# EAGLE board InkTime_PCB (EAGLE 9.7.0)
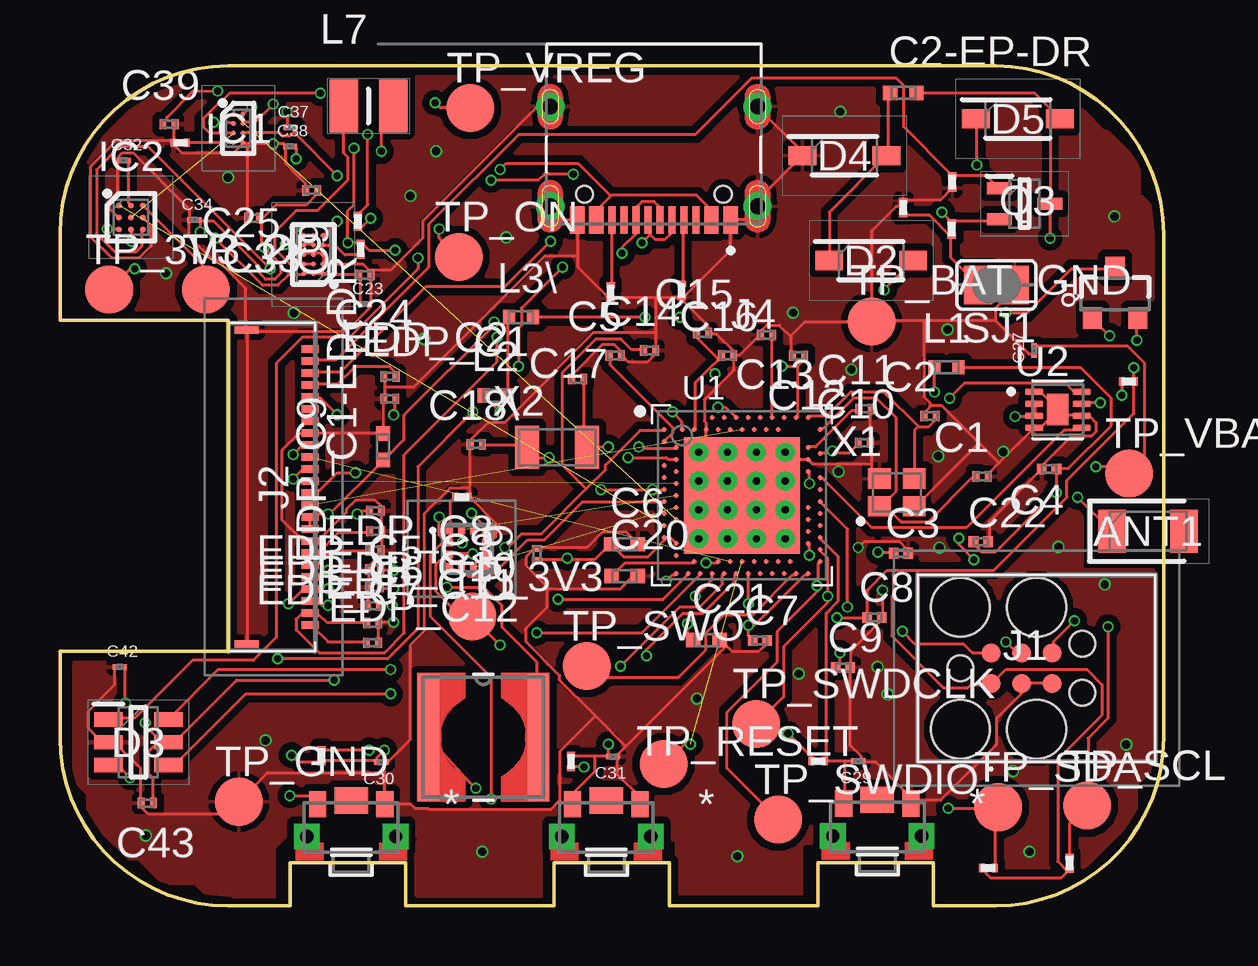
[diagram p0: board, top side]
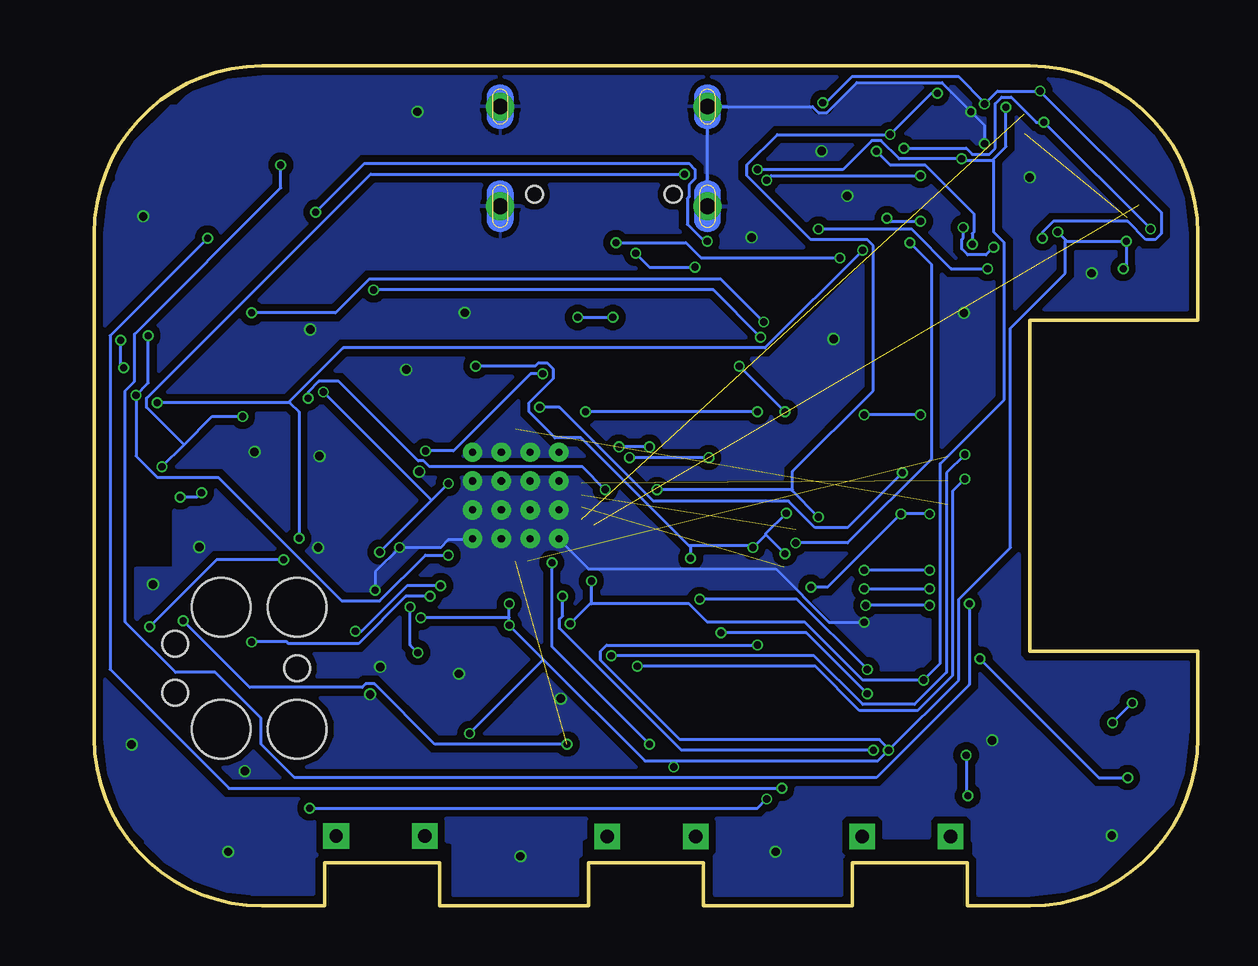
[diagram p1: board, bottom side, seen from below]

Size 46 x 35 mm. Coordinates in mm from the lower left corner, seen from the top.
Outline: 39,0 36.4,0 36.4,1.8 31.6,1.8 31.6,0 25.4,0 25.4,1.8 20.6,1.8 20.6,0 14.4,0 14.4,1.8 9.6,1.8 9.6,0 7,0 arc-90 0,7 0,10.6 7,10.6 7,24.4 0,24.4 0,28 arc-90 7,35 39,35 arc-90 46,28 46,7 arc-90 39,0
Copper layers (1*16): Top / Bottom
Stack-up Default Layer Stack: Top User Defined 0.035mm / Dielectric-1 User Defined 1.6mm / Bottom User Defined 0.035mm
Design rules: minimum copper width 5mil, minimum drill size 0.3mm, copper clearance wire_polygon to wire_polygon 5mil, copper clearance wire_polygon to pad_smd 5mil, copper clearance wire_polygon to via 5mil, copper clearance pad_smd to pad_smd 5mil, copper clearance pad_smd to via 5mil, copper clearance via to via 5mil, copper clearance smd to pad (same net) 5mil, copper clearance smd to via (same net) 5mil, copper clearance smd to smd (same net) 5mil, dimension clearance 0.2mm, via restrict clearance 0mil, restrict clearance 0mil, drill distance 6mil, keepout clearance 0mil

## Footprints (pad centres in the part's own frame; a part is rotated, then mirrored left to right if it is on the bottom)
2450AT18B100E_ANTC3216X140N = smd 1.15 x 1.8: 1 -1.5,0; 2 1.5,0
NORDIC_NRF_3_RESC0201_L = smd 0.28 x 0.43: 1 -0.255,0; 2 0.255,0
NORDIC_NRF_3_RESC0402_N = smd 0.6 x 0.6: 1 -0.55,0; 2 0.55,0
NORDIC_NRF_3_RESC0201_N = smd 0.4 x 0.45: 1 -0.305,0; 2 0.305,0
GRM011R60J152KE01L_2_CAPC0201X13N = smd 0.22 x 0.23: 1 -0.185,0; 2 0.185,0
ESP32_C6_LIBRARY_5_SOD3716X135N = smd 1.15 x 0.8: 1 -1.75,0; 2 1.75,0
ESP32_C6_LIBRARY_3_SOT95P280X145-6N = smd 1.2 x 0.6: 1 -1.25,0.95; 2 -1.25,0; 3 -1.25,-0.95; 4 1.25,-0.95; 5 1.25,0; 6 1.25,0.95
BQ25180YBGR_BGA8C40P2X4_100X155X50 = smd 0.2 x 0.2: A1 -0.2,0.6; A2 0.2,0.6; B1 -0.2,0.2; B2 0.2,0.2; C1 -0.2,-0.2; C2 0.2,-0.2; D1 -0.2,-0.6; D2 0.2,-0.6
DRV2605YZFR_BGA9C50P3X3_144X144X62 = smd 0.25 x 0.25: A1 -0.5,0.5; A2 0,0.5; A3 0.5,0.5; B1 -0.5,0; B2 0,0; B3 0.5,0; C1 -0.5,-0.5; C2 0,-0.5; C3 0.5,-0.5
BMA423_BMA423 = smd 0.3 x 0.35: 1 -0.75,-0.775; 2 -0.25,-0.775; 3 0.25,-0.775; 4 0.75,-0.775; 7 0.75,0.775; 8 0.25,0.775; 9 -0.25,0.775; 10 -0.75,0.775 | smd 0.35 x 0.3: 5 0.775,-0.25; 6 0.775,0.25; 11 -0.775,0.25; 12 -0.775,-0.25
RT6160AWSC_BGA15C40P3X5_140X230X60 = smd 0.216 x 0.216: A1 -0.4,0.8; A2 0,0.8; A3 0.4,0.8; B1 -0.4,0.4; B2 0,0.4; B3 0.4,0.4; C1 -0.4,0; C2 0,0; C3 0.4,0; D1 -0.4,-0.4; D2 0,-0.4; D3 0.4,-0.4; E1 -0.4,-0.8; E2 0,-0.8; E3 0.4,-0.8
TC2030-IDC_TC2030IDC = smd 0.783 x 0.783: 1 -0.953,-0.635; 2 -0.953,0.635; 3 0.317,-0.635; 4 0.317,0.635; 5 1.588,-0.635; 6 1.588,0.635 | hole 2.451: -2.223,-2.54; -2.223,2.54; 0.952,-2.54; 0.952,2.54 | hole 1.067: -2.223,0; 2.857,-1.016; 2.857,1.016
503480-2400_5034802400 = smd 0.3 x 0.7: 1 -5.75,1.525; 2 -5.25,1.525; 3 -4.75,1.525; 4 -4.25,1.525; 5 -3.75,1.525; 6 -3.25,1.525; 7 -2.75,1.525; 8 -2.25,1.525; 9 -1.75,1.525; 10 -1.25,1.525; 11 -0.75,1.525; 12 -0.25,1.525; 13 0.25,1.525; 14 0.75,1.525; 15 1.25,1.525; 16 1.75,1.525; 17 2.25,1.525; 18 2.75,1.525; 19 3.25,1.525; 20 3.75,1.525; 21 4.25,1.525; 22 4.75,1.525; 23 5.25,1.525; 24 5.75,1.525 | smd 0.3 x 1: MP1 -6.54,-1.125; MP2 6.54,-1.125
KH-TYPE-C-16P_KINGHELM_KH-TYPE-C-16P = smd 0.6 x 1.15: A1_B12 -3.2,4.725; A4_B9 -2.4,4.725; A9_B4 2.4,4.725; A12_B1 3.2,4.725 | smd 0.3 x 1.15: A5 -1.25,4.725; A6 -0.25,4.725; A7 0.25,4.725; A8 1.25,4.725; B5 1.75,4.725; B6 0.75,4.725; B7 -0.75,4.725; B8 -1.75,4.725 | drill 0.65 pad 1.05: SH1 -4.32,0; SH2 4.32,0; SH3 -4.32,4.15; SH4 4.32,4.15 | hole 0.7: -2.89,3.65; 2.89,3.65
NORDIC_NRF_2_RESC0402_L = smd 0.5 x 0.6: 1 -0.5,0; 2 0.5,0
ESP32_C6_LIBRARY_2_IND_4828-WE-TPC_WRE = smd 0.9 x 5.3: 1 -2.286,0; 2 2.286,0
MLP2016SR47MT0S1_INDC2016X100N = smd 1.2 x 2.2: 1 -1.028,0; 2 1.028,0
ESP32_C6_LIBRARY_4_ESP32_C6_LIBRARY_4_ESP32_C6_LIBRARY_4_ESP32_C6_LIBRARY_4_ESP32_WROVER_SPARKFUN-DISCRETESEMI_SOT23-3 = smd 0.8 x 0.9: 1 -0.95,-1; 2 0.95,-1; 3 0,1.1
ESP32_C6_LIBRARY_6_SOT65P210X110-3N = smd 1.05 x 0.5: 1 -1.05,0.65; 2 -1.05,-0.65; 3 1.05,0
CPF0201D7K68C1_0201 = smd 0.35 x 0.25: 1 0,0.275; 2 0,-0.275
ESP32_C6_LIBRARY_7_JUMPER_SJ = smd 1.168 x 1.6: 1 -0.762,0; 2 0.762,0
2025-10-22_07-23-44_LIBRARY_SW_EVP-AKE31A_PAN = smd 0.711 x 1.092: 1 -1.4,-0.972; 2 1.4,-0.972 | drill 0.559 pad 0.914 square: 3 -1.848,0.381; 4 1.848,0.381 | smd 1.397 x 1.092: 5 0,-1.124
HECTOR_WATCH_1_TP20R = smd 2 x 2: TP 0,0
NORDIC_NRF_4_AQFN50P700X700X85_HS-74N = smd 4.85 x 4.85: P$74 0,0 | drill 0.3 pad 0.6: P$75 -1.8,1.8; P$76 -0.6,1.8; P$77 0.6,1.8; P$78 1.8,1.8; P$79 -1.8,0.6; P$80 -0.6,0.6; P$81 0.6,0.6; P$82 1.8,0.6; P$83 -1.8,-0.6; P$84 -0.6,-0.6; P$85 0.6,-0.6; P$86 1.8,-0.6; P$87 -1.8,-1.8; P$88 -0.6,-1.8; P$89 0.6,-1.8; P$90 1.8,-1.8 | smd 0.2 x 0.2: P$A8 -1.25,3.25; P$A10 -0.75,3.25; P$A12 -0.25,3.25; P$A14 0.25,3.25; P$A16 0.75,3.25; P$A18 1.25,3.25; P$A20 1.75,3.25; P$A22 2.25,3.25; P$A23 2.75,3.25; P$AA24 3.25,-2.25; P$AB2 -2.75,-2.5; P$AC5 -2,-2.75; P$AC9 -1,-2.75; P$AC11 -0.5,-2.75; P$AC13 0,-2.75; P$AC15 0.5,-2.75; P$AC17 1,-2.75; P$AC19 1.5,-2.75; P$AC21 2,-2.75; P$AC24 3.25,-2.75; P$AD2 -2.75,-3.25; P$AD4 -2.25,-3.25; P$AD6 -1.75,-3.25; P$AD8 -1.25,-3.25; P$AD10 -0.75,-3.25; P$AD12 -0.25,-3.25; P$AD14 0.25,-3.25; P$AD16 0.75,-3.25; P$AD18 1.25,-3.25; P$AD20 1.75,-3.25; P$AD22 2.25,-3.25; P$AD23 2.75,-3.25; P$B1 -3.25,2.75; P$B3 -2.5,2.75; P$B5 -2,2.75; P$B7 -1.5,2.75; P$B9 -1,2.75; P$B11 -0.5,2.75; P$B13 0,2.75; P$B15 0.5,2.75; P$B17 1,2.75; P$B19 1.5,2.75; P$B24 3.25,2.75; P$C1 -3.25,2.25; P$D2 -2.75,2; P$D23 2.75,2; P$E24 3.25,1.75; P$F2 -2.75,1.5; P$F23 2.75,1.5; P$G1 -3.25,1.25; P$H2 -2.75,1; P$H23 2.75,1; P$J1 -3.25,0.75; P$J24 3.25,0.75; P$K2 -2.75,0.5; P$L1 -3.25,0.25; P$L24 3.25,0.25; P$M2 -2.75,0; P$N1 -3.25,-0.25; P$N24 3.25,-0.25; P$P2 -2.75,-0.5; P$P23 2.75,-0.5; P$R1 -3.25,-0.75; P$R24 3.25,-0.75; P$T2 -2.75,-1; P$T23 2.75,-1; P$U1 -3.25,-1.25; P$U24 3.25,-1.25; P$V23 2.75,-1.5; P$W1 -3.25,-1.75; P$W24 3.25,-1.75; P$Y2 -2.75,-2; P$Y23 2.75,-2
ESP32_C6_LIBRARY_SON50P200X200X80-9N = smd 0.76 x 0.27: 1 -0.985,0.75; 2 -0.985,0.25; 3 -0.985,-0.25; 4 -0.985,-0.75; 5 0.985,-0.75; 6 0.985,-0.25; 7 0.985,0.25; 8 0.985,0.75 | smd 0.9 x 1.3: 9 0,0
NORDIC_NRF_BT-XTAL_2016_N = smd 0.95 x 0.85: 1 -0.725,-0.575; 2 0.725,-0.575; 3 0.725,0.575; 4 -0.725,0.575
NORDIC_NRF_1_XTAL_3215_N = smd 1 x 1.8: 1 -1.25,0; 2 1.25,0

## Placement (x,y rotation side)
ANT1  2450AT18B100E  [2450AT18B100E_ANTC3216X140N]  45.35,15.62 0 top
C1  12pF  [NORDIC_NRF_3_RESC0201_L]  38.43,17.89 0 top
C1-ED-DR  10uF  [NORDIC_NRF_3_RESC0402_N]  13.47,19.13 90 top
C2  12pF  [NORDIC_NRF_3_RESC0201_L]  36.27,20.41 0 top
C2-EP-DR  4.7uF  [NORDIC_NRF_3_RESC0402_N]  35.15,33.87 0 top
C3  1pF  [NORDIC_NRF_3_RESC0201_N]  35.05,14.69 0 top
C4  1pF  [NORDIC_NRF_3_RESC0201_N]  41.23,18.2 180 top
C5  100nF  [NORDIC_NRF_3_RESC0201_L]  23.14,22.93 0 top
C6  4.7uF  [NORDIC_NRF_3_RESC0402_N]  23.53,15.07 0 top
C7  100nF  [NORDIC_NRF_3_RESC0201_N]  29.17,11.06 0 top
C8  100nF  [NORDIC_NRF_3_RESC0201_N]  33.95,12.02 0 top
C9  820pF  [NORDIC_NRF_3_RESC0201_N]  32.64,9.93 0 top
C10  N.C.  [NORDIC_NRF_3_RESC0201_L]  33.53,19.29 0 top
C11  100pF  [NORDIC_NRF_3_RESC0201_L]  33.56,20.71 0 top
C12  100nF  [NORDIC_NRF_3_RESC0201_L]  30.78,22.92 180 top
C13  N.C.  [NORDIC_NRF_3_RESC0201_L]  29.45,23.79 180 top
C14  4.7uF  [NORDIC_NRF_3_RESC0201_L]  24.58,23.14 0 top
C15  1.0uF  [NORDIC_NRF_3_RESC0201_L]  26.78,23.86 0 top
C16  47nF  [NORDIC_NRF_3_RESC0201_L]  27.83,22.93 0 top
C17  12pF  [NORDIC_NRF_3_RESC0201_L]  21.58,21.95 0 top
C18\  12pF  [NORDIC_NRF_3_RESC0201_L]  17.35,19.23 0 top
C19  100nF  [NORDIC_NRF_3_RESC0201_L]  19.88,14.63 90 top
C20  4.7uF  [NORDIC_NRF_3_RESC0402_N]  23.54,13.74 0 top
C21  4.7uF  [NORDIC_NRF_3_RESC0402_N]  26.94,11.07 0 top
C22  N.C.  [NORDIC_NRF_3_RESC0201_N]  38.38,15.18 0 top
C23  0.1uF  [GRM011R60J152KE01L_2_CAPC0201X13N]  12.71,25.07 0 top
C24  10uF  [NORDIC_NRF_3_RESC0201_L]  12.71,26.29 180 top
C25  22uF  [NORDIC_NRF_3_RESC0201_L]  10.49,29.81 180 top
C27  0.1uF  [GRM011R60J152KE01L_2_CAPC0201X13N]  40.61,23.14 90 top
C29  1uF  [GRM011R60J152KE01L_2_CAPC0201X13N]  33.27,6.03 180 top
C30  1uF  [GRM011R60J152KE01L_2_CAPC0201X13N]  13.4,5.99 180 top
C31  1uF  [GRM011R60J152KE01L_2_CAPC0201X13N]  23.05,6.23 180 top
C32  1uF  [GRM011R60J152KE01L_2_CAPC0201X13N]  2.66,31.06 0 top
C33  22uF  [NORDIC_NRF_3_RESC0201_L]  8.07,28.66 180 top
C34  0.1uF  [GRM011R60J152KE01L_2_CAPC0201X13N]  5.61,28.58 0 top
C37  1uF  [GRM011R60J152KE01L_2_CAPC0201X13N]  9.61,32.43 0 top
C38  1uF  [GRM011R60J152KE01L_2_CAPC0201X13N]  9.59,31.64 0 top
C39  10uF  [NORDIC_NRF_3_RESC0201_L]  4.54,32.57 0 top
C42  0.1uF  [GRM011R60J152KE01L_2_CAPC0201X13N]  2.49,9.96 0 top
C43  4.7uF  [NORDIC_NRF_3_RESC0201_L]  3.64,4.28 180 top
D2  MBR0530  [ESP32_C6_LIBRARY_5_SOD3716X135N]  33.81,26.89 0 top
D3  USBLC6-2SC6Y  [ESP32_C6_LIBRARY_3_SOT95P280X145-6N]  3.27,6.82 0 top
D4  MBR0530  [ESP32_C6_LIBRARY_5_SOD3716X135N]  32.7,31.26 0 top
D5  MBR0530  [ESP32_C6_LIBRARY_5_SOD3716X135N]  39.93,32.79 0 top
EDP_C1  10uF  [NORDIC_NRF_3_RESC0201_L]  13.75,21.13 0 top
EDP_C2  10uF  [NORDIC_NRF_3_RESC0201_L]  13.75,22.06 0 top
EDP_C5  0.1uF/50V  [NORDIC_NRF_3_RESC0201_L]  13.15,16.46 180 top
EDP_C6  1uF/50V  [NORDIC_NRF_3_RESC0201_L]  13.16,15.61 180 top
EDP_C7  1uF/50V  [NORDIC_NRF_3_RESC0201_L]  13.13,14.81 180 top
EDP_C8  1uF/50V  [NORDIC_NRF_3_RESC0201_L]  13.11,14.02 0 top
EDP_C9  1uF/50V  [NORDIC_NRF_3_RESC0201_L]  13.1,13.28 0 top
EDP_C10  1uF/50V  [NORDIC_NRF_3_RESC0201_L]  13.06,12.5 0 top
EDP_C11  1uF/50V  [NORDIC_NRF_3_RESC0201_L]  13.04,11.78 0 top
EDP_C12  1uF/50V  [NORDIC_NRF_3_RESC0201_L]  13.03,10.96 0 top
IC1  BQ25180YBGR  [BQ25180YBGR_BGA8C40P2X4_100X155X50]  7.43,32.4 0 top
IC2  DRV2605YZFR  [DRV2605YZFR_BGA9C50P3X3_144X144X62]  2.96,28.69 0 top
IC3  BMA421  [BMA423_BMA423]  16.99,14.89 270 top
IC9  RT6160AWSC  [RT6160AWSC_BGA15C40P3X5_140X230X60]  10.56,27.14 180 top
J1  TC2030-IDC_TC2030-IDC  [TC2030-IDC_TC2030IDC]  39.76,9.9 0 top
J2  503480-2400_503480-2400  [503480-2400_5034802400]  8.9,17.45 270 top
J4  KH-TYPE-C-16P  [KH-TYPE-C-16P_KINGHELM_KH-TYPE-C-16P]  24.76,33.3 180 top
L1  3.9nH  [NORDIC_NRF_2_RESC0402_L]  36.95,22.44 0 top
L2  10uH  [NORDIC_NRF_2_RESC0402_L]  18.15,21.26 0 top
L3\  15nH  [NORDIC_NRF_2_RESC0402_L]  19.22,24.53 0 top
L5  68 uH  [ESP32_C6_LIBRARY_2_IND_4828-WE-TPC_WRE]  17.65,7.02 0 top
L7  FTC252012SR47MBCA  [MLP2016SR47MT0S1_INDC2016X100N]  12.86,33.33 0 top
Q1  20V/4.2A/52mΩ/1.4W  [ESP32_C6_LIBRARY_4_ESP32_C6_LIBRARY_4_ESP32_C6_LIBRARY_4_ESP32_C6_LIBRARY_4_ESP32_WROVER_SPARKFUN-DISCRETESEMI_SOT23-3]  43.98,25.49 0 top
Q3  SI1308EDL-T1-GE3  [ESP32_C6_LIBRARY_6_SOT65P210X110-3N]  40.21,29.26 0 top
R1  10K  [CPF0201D7K68C1_0201]  12.53,27.36 0 top
R1_EP_DR1  0.47  [CPF0201D7K68C1_0201]  37.17,28.2 0 top
R1_USB  5K1  [CPF0201D7K68C1_0201]  25.91,25.64 180 top
R2  10K  [CPF0201D7K68C1_0201]  12.42,28.52 0 top
R2_EP_DR  10K  [CPF0201D7K68C1_0201]  37.18,30.16 0 top
R2_USB  5K1  [CPF0201D7K68C1_0201]  22.95,25.58 0 top
R3  0  [CPF0201D7K68C1_0201]  16.75,17.04 270 top
R5  10K  [CPF0201D7K68C1_0201]  10.9,6.26 0 top
R7  10K  [CPF0201D7K68C1_0201]  31.61,6.03 90 top
R8  10K  [CPF0201D7K68C1_0201]  21.3,6.02 180 top
R9  10K  [CPF0201D7K68C1_0201]  5.01,31.8 90 top
R17  3K3  [CPF0201D7K68C1_0201]  42.08,1.78 0 top
R18  3K3  [CPF0201D7K68C1_0201]  38.69,1.57 270 top
R_PWR_EPD  10K  [CPF0201D7K68C1_0201]  44.54,21.85 270 top
R_TYPE_SEL  2.2  [CPF0201D7K68C1_0201]  35.14,29.1 180 top
SJ1  [ESP32_C6_LIBRARY_7_JUMPER_SJ]  39.03,25.87 180 top
SW_DN  2025-10-22_07-23-44_LIBRARY_EVP-AKE31ASW_EVP-AKE31A_PAN  [2025-10-22_07-23-44_LIBRARY_SW_EVP-AKE31A_PAN]  34.07,3.29 180 top
SW_ENT  2025-10-22_07-23-44_LIBRARY_EVP-AKE31ASW_EVP-AKE31A_PAN  [2025-10-22_07-23-44_LIBRARY_SW_EVP-AKE31A_PAN]  22.77,3.27 180 top
SW_UP  2025-10-22_07-23-44_LIBRARY_EVP-AKE31ASW_EVP-AKE31A_PAN  [2025-10-22_07-23-44_LIBRARY_SW_EVP-AKE31A_PAN]  12.14,3.27 180 top
TP_3V3  HECTOR_WATCH_1_TPTP20R  [HECTOR_WATCH_1_TP20R]  17.19,12.05 0 top
TP_3V3_2  HECTOR_WATCH_1_TPTP20R  [HECTOR_WATCH_1_TP20R]  2.05,25.68 0 top
TP_BAT_GND  HECTOR_WATCH_1_TPTP20R  [HECTOR_WATCH_1_TP20R]  33.83,24.34 0 top
TP_GND  HECTOR_WATCH_1_TPTP20R  [HECTOR_WATCH_1_TP20R]  7.46,4.34 0 top
TP_ON  HECTOR_WATCH_1_TPTP20R  [HECTOR_WATCH_1_TP20R]  16.62,27.04 0 top
TP_OP  HECTOR_WATCH_1_TPTP20R  [HECTOR_WATCH_1_TP20R]  6.09,25.68 0 top
TP_RESET  HECTOR_WATCH_1_TPTP20R  [HECTOR_WATCH_1_TP20R]  25.16,5.91 0 top
TP_SCL  HECTOR_WATCH_1_TPTP20R  [HECTOR_WATCH_1_TP20R]  42.82,4.17 0 top
TP_SDA  HECTOR_WATCH_1_TPTP20R  [HECTOR_WATCH_1_TP20R]  39.1,4.11 0 top
TP_SWDCLK  HECTOR_WATCH_1_TPTP20R  [HECTOR_WATCH_1_TP20R]  29.03,7.58 0 top
TP_SWDIO  HECTOR_WATCH_1_TPTP20R  [HECTOR_WATCH_1_TP20R]  29.93,3.59 0 top
TP_SWO  HECTOR_WATCH_1_TPTP20R  [HECTOR_WATCH_1_TP20R]  21.95,9.99 0 top
TP_VBAT  HECTOR_WATCH_1_TPTP20R  [HECTOR_WATCH_1_TP20R]  44.56,18.02 0 top
TP_VREG  HECTOR_WATCH_1_TPTP20R  [HECTOR_WATCH_1_TP20R]  17.11,33.25 0 top
U1  NRF52840_QF  [NORDIC_NRF_4_AQFN50P700X700X85_HS-74N]  28.43,17.1 0 top
U2  ESP32_C6_LIBRARY_MAX17048G+T10  [ESP32_C6_LIBRARY_SON50P200X200X80-9N]  41.59,20.68 0 top
X1  32MHz  [NORDIC_NRF_BT-XTAL_2016_N]  34.88,17.23 0 top
X2  32.726kHz  [NORDIC_NRF_1_XTAL_3215_N]  20.73,19.11 0 top

## Library data of the parts
ANT1 = InkTime_v5; ARROW_PART_NUMBER: 2450AT18B100E; ARROW_PRICE-STOCK: https://www.arrow.com/en/products/2450at18b100e/johanson-dielectrics?utm_currency=USD&region=nac; DESCRIPTION: Antennas 2.45GHz ANTENNA; HEIGHT: 1.4mm; MANUFACTURER_NAME: JOHANSON TECHNOLOGY; MANUFACTURER_PART_NUMBER: 2450AT18B100E; MOUSER_PART_NUMBER: 609-2450AT18B100E; MOUSER_PRICE-STOCK: https://www.mouser.co.uk/ProductDetail/Johanson-Technology/2450AT18B100E?qs=yCnrNFeXz%252Bh5MFsFIXGZGA%3D%3D
C1 C1-ED-DR C2 C2-EP-DR C3-C17 C18\ C19-C22 C24 C25 C33 C39 C43 EDP_C1 EDP_C2 EDP_C5-EDP_C12 L1 L2 L3\ R1 R1_EP_DR1 R1_USB R2 R2_EP_DR R2_USB R3 R5 R7-R9 R17 R18 R_PWR_EPD R_TYPE_SEL SJ1 TP_3V3 TP_3V3_2 TP_BAT_GND TP_GND TP_ON TP_OP TP_RESET TP_SCL TP_SDA TP_SWDCLK TP_SWDIO TP_SWO TP_VBAT TP_VREG U1 X1 X2 = InkTime_v5
C23 C27 C29-C32 C34 C37 C38 C42 = InkTime_v5; AVAILABILITY: In Stock; CHECK_PRICES: https://www.snapeda.com/parts/GRM011R60J152KE01L/Murata/view-part/?ref=eda; DESCRIPTION: SMD Capacitor X5R(EIA) with Capacitance: 1500pF Tol. 10%. Rated Voltage: 6.3Vdc; MF: Murata; MP: GRM011R60J152KE01L; PACKAGE: 0201 Murata; PRICE: None; SNAPEDA_LINK: https://www.snapeda.com/parts/GRM011R60J152KE01L/Murata/view-part/?ref=snap
D2 D4 D5 = InkTime_v5; AVAILABILITY: In Stock; CHECK_PRICES: https://www.snapeda.com/parts/MBR0530/Onsemi/view-part/?ref=eda; DESCRIPTION: Diode Schottky 30 V 500mA Surface Mount SOD-123; MF: ON Semiconductor; MP: MBR0530; PACKAGE: SOD-123-2 ON Semiconductor; PRICE: None; PURCHASE-URL: https://www.snapeda.com/api/url_track_click_mouser/?unipart_id=179458&manufacturer=ON Semiconductor&part_name=MBR0530&search_term=None; SNAPEDA_LINK: https://www.snapeda.com/parts/MBR0530/Onsemi/view-part/?ref=snap
D3 = InkTime_v5; AVAILABILITY: In Stock; CHECK_PRICES: https://www.snapeda.com/parts/USBLC6-2SC6Y/STMicroelectronics/view-part/?ref=eda; DESCRIPTION: 17V Clamp 5A (8/20µs) Ipp Tvs Diode Surface Mount SOT-23-6; MF: STMicroelectronics; MP: USBLC6-2SC6Y; PACKAGE: SOT-23-6 STMicroelectronics; PRICE: None; SNAPEDA_LINK: https://www.snapeda.com/parts/USBLC6-2SC6Y/STMicroelectronics/view-part/?ref=snap
IC1 = InkTime_v5; ARROW_PART_NUMBER: BQ25180YBGR; ARROW_PRICE-STOCK: https://www.arrow.com/en/products/bq25180ybgr/texas-instruments?utm_currency=USD&region=nac; DESCRIPTION: Charger IC Lithium Ion/Polymer, Lithium Iron Phosphate 8-DSBGA (1.6x1.1); HEIGHT: 0.5mm; MANUFACTURER_NAME: Texas Instruments; MANUFACTURER_PART_NUMBER: BQ25180YBGR; MOUSER_PART_NUMBER: 595-BQ25180YBGR; MOUSER_PRICE-STOCK: https://www.mouser.co.uk/ProductDetail/Texas-Instruments/BQ25180YBGR?qs=doiCPypUmgEWjAK%252BJAX6Tw%3D%3D
IC2 = InkTime_v5; ARROW_PART_NUMBER: DRV2605YZFR; ARROW_PRICE-STOCK: https://www.arrow.com/en/products/drv2605yzfr/texas-instruments?region=nac; DESCRIPTION: Haptic Driver for ERM/LRA with Built-In Library and Smart Loop Architecture; HEIGHT: 0.625mm; MANUFACTURER_NAME: Texas Instruments; MANUFACTURER_PART_NUMBER: DRV2605YZFR
IC3 = InkTime_v5; ARROW_PART_NUMBER: BMA423; ARROW_PRICE-STOCK: https://www.arrow.com/en/products/bma423/bosch; DESCRIPTION: Accelerometers Triaxial low-g 12bit Acceleration Sensor; HEIGHT: 1mm; MANUFACTURER_NAME: BOSCH; MANUFACTURER_PART_NUMBER: BMA423; MOUSER_PART_NUMBER: 262-BMA423; MOUSER_PRICE-STOCK: https://www.mouser.co.uk/ProductDetail/Bosch-Sensortec/BMA423?qs=HXFqYaX1Q2xC%252BSgeGoX3mg%3D%3D
IC9 = InkTime_v5; DESCRIPTION: Buck-Boost Regulator Positive Output Step-Up/Step-Down I2C DC-DC Controller IC 15-WL-CSP (BSC) (1.4x2.3); HEIGHT: 0.6mm; MANUFACTURER_NAME: RICHTEK; MANUFACTURER_PART_NUMBER: RT6160AWSC; MOUSER_PART_NUMBER: 835-RT6160AWSC; MOUSER_PRICE-STOCK: https://www.mouser.co.uk/ProductDetail/Richtek/RT6160AWSC?qs=amGC7iS6iy%2FLd9PSoixZXQ%3D%3D
J1 = InkTime_v5; DESCRIPTION: CABLE ADAPTER 6 POS; HEIGHT: 19mm; MANUFACTURER_NAME: Tag Connect; MANUFACTURER_PART_NUMBER: TC2030-IDC
J2 = InkTime_v5; DESCRIPTION: FFC & FPC Connectors 0.5mm FPC RA SMT Dual Contact 24Ckt; HEIGHT: 1.87mm; MANUFACTURER_NAME: Molex; MANUFACTURER_PART_NUMBER: 503480-2400; MOUSER_PART_NUMBER: 538-503480-2400; MOUSER_PRICE-STOCK: https://www.mouser.co.uk/ProductDetail/Molex/503480-2400?qs=OAhjpuo3Vu7efIoxFh9AOw%3D%3D
J4 = InkTime_v5; AVAILABILITY: Not in stock; CHECK_PRICES: https://www.snapeda.com/parts/KH-TYPE-C-16P/Kinghelm/view-part/?ref=eda; MF: kinghelm; MP: KH-TYPE-C-16P; PACKAGE: None; PRICE: None; SNAPEDA_LINK: https://www.snapeda.com/parts/KH-TYPE-C-16P/Kinghelm/view-part/?ref=snap
L5 = InkTime_v5; COPYRIGHT: Copyright (C) 2024 Ultra Librarian. All rights reserved.; MANUFACTURER_PART_NUMBER: 744043680; MFR_NAME: Wurth Electronics
L7 = InkTime_v5; DESCRIPTION: SMD / SMT Inductors (Coils), L=0.47?H, L x W x T :; HEIGHT: 1mm; JLCPCB: https://jlcpcb.com/partdetail/6763488-FTC252012SR47MBCA/C5832368; MANUFACTURER_NAME: TDK; MANUFACTURER_PART_NUMBER: FTC252012SR47MBCA
Q1 = InkTime_v5; PROD_ID: TRAN-14388
Q3 = InkTime_v5; AVAILABILITY: In Stock; CHECK_PRICES: https://www.snapeda.com/parts/SI1308EDL-T1-GE3/Vishay+Siliconix/view-part/?ref=eda; DESCRIPTION: Si1308EDL-T1-GE3 N-channel MOSFET Transistor, 1.5 A, 30 V, 3-Pin SC-70 | Siliconix / Vishay SI1308EDL-T1-GE3; MF: Vishay Siliconix; MP: SI1308EDL-T1-GE3; PACKAGE: SOT-323 Vishay Semiconductor; PRICE: None; PURCHASE-URL: https://www.snapeda.com/api/url_track_click_mouser/?unipart_id=274603&manufacturer=Vishay Siliconix&part_name=SI1308EDL-T1-GE3&search_term=None; SNAPEDA_LINK: https://www.snapeda.com/parts/SI1308EDL-T1-GE3/Vishay+Siliconix/view-part/?ref=snap
SW_DN SW_ENT SW_UP = InkTime_v5; COPYRIGHT: Copyright (C) 2025 Ultra Librarian. All rights reserved.; DIGI-KEY_PART_NUMBER_1: P123437TR-ND; DIGI-KEY_PART_NUMBER_2: P123437CT-ND; DIGI-KEY_PART_NUMBER_3: P123437DKR-ND; MANUFACTURER_NAME: Panasonic; MANUFACTURER_PART_NUMBER: EVP-AKE31A
U2 = InkTime_v5; AVAILABILITY: In Stock; CHECK_PRICES: https://www.snapeda.com/parts/MAX17048G+T10/Analog+Devices/view-part/?ref=eda; DESCRIPTION: 3µA 1-Cell/2-Cell Fuel Gauge with ModelGauge; MF: Analog Devices; MP: MAX17048G+T10; PACKAGE: TDFN-8 Maxim; PRICE: None; PURCHASE-URL: https://www.snapeda.com/api/url_track_click_mouser/?unipart_id=329239&manufacturer=Analog Devices&part_name=MAX17048G+T10&search_term=None; SNAPEDA_LINK: https://www.snapeda.com/parts/MAX17048G+T10/Analog+Devices/view-part/?ref=snap

## Nets
3V1: C5.1 U1.P$C1
3V3 [POWER]: C6.1 C7.1 C8.1 C12.1 C14.1 C19.1 C25.1 C33.1 C34.2 IC2.C2 IC3.3 IC3.7 IC3.10 IC9.E2 IC9.E3 J1.1 Q1.2 R5.1 R7.1 R8.1 R17.2 R18.2 R_PWR_EPD.1 TP_3V3.TP TP_3V3_2.TP U1.P$A22 U1.P$AD14 U1.P$AD23 U1.P$B1 U1.P$W1 U1.P$Y2
ALERT: U1.P$J24 U2.5
D+: D3.4 U1.P$AD6
D-: D3.6 U1.P$AD4
DN: D3.1 J4.A7 J4.B7
DP: D3.3 J4.A6 J4.B6
EPD_3V3 [POWER]: C1-ED-DR.1 EDP_C5.2 J2.15 J2.16 L5.2 Q1.3
EPD_BUSY: J2.9 U1.P$AD12
EPD_CS: J2.12 U1.P$K2
EPD_DC: J2.11 U1.P$AD10
EPD_RST: J2.10 U1.P$AC11
ESP_3V1: EDP_C6.2 J2.18
ESP_3V2: EDP_C7.2 J2.19
ESP_3V4: EDP_C8.2 J2.20
ESP_3V6: EDP_C10.2 J2.22
GDR: J2.2 Q3.1 R2_EP_DR.1
GND [POWER]: C1-ED-DR.2 C1.2 C2.1 C3.2 C4.2 C5.2 C6.2 C7.2 C8.2 C9.2 C10.2 C11.2 C12.2 C13.2 C14.2 C15.2 C16.2 C17.1 C18\.1 C19.2 C20.2 C21.2 C22.2 C23.2 C24.1 C25.2 C27.1 C29.1 C30.1 C31.1 C32.1 C33.2 C34.1 C37.1 C38.1 C39.2 C42.1 C43.2 D3.2 D4.1 EDP_C1.1 EDP_C2.1 EDP_C5.1 EDP_C6.1 EDP_C7.1 EDP_C8.1 EDP_C9.1 EDP_C10.1 EDP_C11.2 EDP_C12.2 IC1.D2 IC2.B1 IC2.B3 IC3.8 IC3.9 IC9.B1 IC9.C1 IC9.C2 IC9.C3 J1.3 J1.5 J2.8 J2.17 J2.MP1 J2.MP2 J4.A1_B12 J4.A12_B1 J4.SH1 J4.SH2 J4.SH3 J4.SH4 R1_USB.1 R2_EP_DR.2 R2_USB.2 R3.1 R9.1 R_TYPE_SEL.2 SJ1.1 SW_DN.1 SW_ENT.1 SW_UP.1 TP_BAT_GND.TP TP_GND.TP U1.P$74 U1.P$75 U1.P$76 U1.P$77 U1.P$78 U1.P$79 U1.P$80 U1.P$81 U1.P$82 U1.P$83 U1.P$84 U1.P$85 U1.P$86 U1.P$87 U1.P$88 U1.P$89 U1.P$90 U1.P$B7 U1.P$F23 U2.1 U2.4 U2.6 U2.9 X1.2 X1.4
GND1: C17.2 U1.P$D2 X2.2
GND2: C18\.2 U1.P$F2 X2.1
GND3: C2.2 U1.P$A23 X1.3
HAPTIC_EN: IC2.A1 U1.P$U1
IMU_INT1: IC3.5 U1.P$N1
IMU_INT2: IC3.6 U1.P$P2
LX1: IC9.B2 IC9.B3 L7.1
LX2: IC9.D2 IC9.D3 L7.2
MOSI: J2.14 U1.P$B13
N$1: L2.1 U1.P$B3
N$2: L2.2 L3\.1
N$3: C10.1 C15.1 C16.1 L3\.2 U1.P$B5 U1.P$E24
N$4: R1_EP_DR1.2 R_TYPE_SEL.1 SJ1.2
N$5: IC1.D1 R9.2
N$6: C2-EP-DR.2 D5.2 L5.1 Q3.3
N$7: C2-EP-DR.1 D2.1 D4.2
N$8: J4.A5 R1_USB.2
N$9: J4.B5 R2_USB.1
N$11: EDP_C2.2 J2.4
N$12: EDP_C1.2 J2.5
N$14: C32.2 IC2.A2
N$15: C13.1 U1.P$A18
N$19: C11.1 U1.P$D23
N$20: C1.1 U1.P$B24 X1.1
N$21: IC9.D1 R1.2
N$22: IC9.E1 R2.2
N$27: EDP_C12.1 J2.24
N$28: IC3.1 R3.2
N$39: C20.1 U1.P$AC5
N$69: C9.1 U1.P$N24
N$74: ANT1.1 C4.1 C22.1 L1.2
N$75: C3.1 L1.1 U1.P$H23
OUT+: IC2.A3 TP_OP.TP
OUT-: IC2.C3 TP_ON.TP
P0.04: U1.P$J1
P0.09: U1.P$L24
P0.13: C30.2 R5.2 SW_UP.2 U1.P$AD8
P0.14: C31.2 R8.2 SW_ENT.2 U1.P$AC9
P0.19: U1.P$AC15
P0.20: U1.P$AD16
P0.21: U1.P$AC17
P0.22: U1.P$AD18
P0.23: U1.P$AC19
P0.24: U1.P$AD20
P0.25: U1.P$AC21
P0.26: U1.P$G1
P0.27: U1.P$H2
P0.28: U1.P$B11
P0.29: U1.P$A10
P0.30: U1.P$B9
P0.31: U1.P$A8
P1.01: Q1.1 R_PWR_EPD.2 U1.P$Y23
P1.02: C29.2 R7.2 SW_DN.2 U1.P$W24
P1.03: U1.P$V23
P1.04: U1.P$U24
P1.05: U1.P$T23
P1.06: U1.P$R24
P1.07: U1.P$P23
P1.09: U1.P$R1
P1.10: U1.P$A20
P1.11: U1.P$B19
P1.12: U1.P$B17
P1.13: U1.P$A16
P1.14: U1.P$B15
P1.15: U1.P$A14
PMIC_INT: IC1.A1 U1.P$T2
PREVGH: D5.1 EDP_C9.2 J2.21
PREVGL: D2.2 EDP_C11.1 J2.23
RESE: J2.3 Q3.2 R1_EP_DR1.1
RESET: J1.6 TP_RESET.TP U1.P$AC13
SCK: J2.13 U1.P$A12
SCL: IC1.B1 IC2.C1 IC3.12 R1.1 R17.1 TP_SCL.TP U1.P$M2 U2.7
SDA: IC1.C1 IC2.B2 IC3.2 R2.1 R18.1 TP_SDA.TP U1.P$L1 U2.8
SWDCLK: J1.4 TP_SWDCLK.TP U1.P$AA24
SWDIO: J1.2 TP_SWDIO.TP U1.P$AC24
SWO: TP_SWO.TP U1.P$AD22
VBAT [POWER]: C27.2 C37.2 IC1.C2 TP_VBAT.TP U2.2 U2.3
VBUS [POWER]: C21.1 C38.2 C42.2 C43.1 D3.5 IC1.A2 J4.A4_B9 J4.A9_B4 U1.P$AD2
VREG [POWER]: C23.1 C24.2 C39.1 IC1.B2 IC9.A1 IC9.A2 IC9.A3 TP_VREG.TP

## Tracks (layer width: path | path; a pad name or v marks a point on that pad's centre or on a via)
3V1
  Top 0.127: U1.P$C1 25.21,19.38 25.52,19.69 25.52,19.95 22.92,22.55 22.92,22.93 C5.1
3V3  (via drill 0.3)
  Top 0.127: R18.2 38.48,1.53 38.61,1.41 38.61,1.34 38.8,1.15 41.72,1.15 42.03,1.47 R17.2 41.97,1.47 41.59,1.85 41.59,6.11 43.43,7.95 43.43,9.22 42.8,9.85 39.43,9.85 38.86,9.28 J1.1 38.8,9.22 37.97,9.22 37.84,9.09 36.83,9.09 34.67,11.25 34.67,12.9 34.73,12.96 34.73,13.98 | 34.73,13.98 34.48,13.98 33.65,13.15 33.65,12.07 C8.1 33.59,12.01 v32.38,12.01 | 34.73,13.98 38.92,13.98 41.97,17.03 41.97,17.73 44.77,20.52 44.77,21.79 R_PWR_EPD.1 44.77,21.85 v44.77,22.42 | v44.89,23.57 44.89,24.46 Q1.2 | 25.21,15.31 25.46,15.31 25.65,15.12 U1.P$Y2 | 25.21,15.31 U1.P$W1 | 21.14,14.42 22.29,14.42 22.92,15.06 C6.1 22.98,15.06 23.49,14.55 24.51,14.55 25.21,15.25 25.21,15.31 | 21.14,14.42 19.94,14.42 C19.1 | 30.73,22.49 30.73,20.39 U1.P$A22 | 30.73,22.49 30.98,22.74 30.98,22.87 C12.1 | 21.94,17.38 20.06,15.5 19.24,15.5 18.64,14.9 | 21.94,17.38 22.73,18.17 22.73,18.36 24.19,19.82 25.14,19.82 U1.P$B1 | 18.64,14.9 17.9,14.17 17.78,14.17 IC3.7 | v18.54,14.93 18.6,14.93 18.64,14.9 | C14.1 24.32,23.19 23.81,23.19 23.37,23.63 22.35,23.63 20.95,22.23 20.95,18.36 21.91,17.41 21.94,17.38 | v30.1,22.49 30.73,22.49 | v17.21,14.68 16.25,14.68 IC3.3 16.19,14.61 16.06,14.61 15.68,14.23 15.68,13.09 16.7,12.07 17.14,12.07 TP_3V3.TP 17.21,12.01 v18.35,10.87 | v21.14,14.49 21.14,14.42 | v2.98,27.69 2.98,28.14 IC2.C2 | v3.11,26.55 2.92,26.55 2.09,25.73 TP_3V3_2.TP | IC9.E2 10.54,27.95 10.22,27.95 IC9.E3 9.84,28.27 v9.78,28.27 | 5.84,28.52 6.41,28.52 8.32,26.62 8.32,26.36 8.57,26.11 8.95,26.11 9.21,26.36 9.21,26.74 v8.51,27.44 8.38,27.57 8.38,28.65 C33.1 8.44,28.65 9.01,29.22 10.29,29.22 10.73,29.66 10.73,29.79 C25.1
  Top 0.127: 5.84,28.52 C34.2 | v5.84,28.08 5.84,28.46 5.84,28.52 | v28.7,12.58 28.7,13.79 U1.P$AD14 | C7.1 28.83,11.12 28.7,11.25 v28.7,11.69 28.95,11.69 31.05,13.79 31.18,13.79 U1.P$AD23 | v12.89,6.49 10.92,6.49 R5.1 | v21.84,5.79 21.33,5.79 R8.1 | v30.35,7.18 31.3,6.23 31.3,6.04 R7.1 | IC3.10 17.71,15.69 17.71,15.8 v17.15,16.36
  Bottom 0.127: v44.89,23.57 44.89,22.55 v44.77,22.42 | 18,15.47 v18.54,14.93 18.54,15 21.14,15 | v30.1,22.49 27.62,22.49 27.49,22.61 27.11,22.61 26.86,22.36 26.86,21.98 27.87,20.96 27.87,20.58 26.8,19.5 25.71,19.5 21.21,15 21.14,15 | v17.21,14.68 17.97,15.44 18,15.47 | 21.14,15 v21.14,14.49 | v3.11,26.55 2.98,26.68 v2.98,27.69 5.46,27.69 5.49,27.73 | v9.78,28.27 9.78,27.82 9.84,27.76 9.84,27.38 9.59,27.12 8.82,27.12 v8.51,27.44 | v5.84,28.08 5.49,27.73 | 28.7,12.01 v28.7,11.69 27.27,10.26 | 28.7,12.01 v28.7,12.58 | v12.89,6.49 13.33,6.04 21.84,6.04 | 21.84,6.04 23.05,6.04 27.27,10.26 | 21.84,6.04 v21.84,5.79 | v30.35,7.18 27.3,10.23 27.27,10.26 | v12.89,6.49 9.97,9.41 9.97,12.77 7.81,14.93 7.81,24.08 5.52,26.36 5.52,27.69 5.49,27.73 | v18.35,10.87 24.64,10.87 24.89,10.61 24.89,10.23 21.59,6.93 13.27,6.93 12.89,6.55 v12.89,6.49 | 28.7,12.01 v32.38,12.01 | 18,15.47 18,15.52 v17.15,16.36
ALERT
  Top 0.127: U1.P$J24 31.68,17.79 31.81,17.79 33.84,15.76 37.78,15.76 41.84,19.82 42.48,19.82 42.54,19.88 U2.5
D+  (via drill 0.3)
  Top 0.127: v19.87,11.37 24.25,11.37 26.67,13.79 U1.P$AD6 | v13.78,8.84 7.74,8.84 4.82,5.92 4.57,5.92 D3.4
  Bottom 0.127: v19.87,11.37 16.32,11.37 v13.78,8.84
D-  (via drill 0.3)
  Top 0.127: v20.76,12.77 25.14,12.77 26.16,13.79 U1.P$AD4 | v13.78,9.85 6.6,9.85 4.57,7.82 D3.6
  Bottom 0.127: v20.76,12.77 16.7,12.77 v13.78,9.85
DN  (via drill 0.3)
  Top 0.127: 24.6,27.98 24.83,27.76 25.21,27.76 25.46,28.01 25.46,28.52 J4.B7 | 24.6,27.98 24.51,28.08 24.51,28.52 J4.A7 | v14.92,27 14.92,26.55 12.06,23.69 10.09,23.69 9.01,22.61 9.01,11.18 8.06,10.23 5.52,10.23 3.11,7.82 2.03,7.82 D3.1 | v24.25,27.63 24.57,27.95 24.6,27.98
  Bottom 0.127: v14.92,27 20.7,27 21.33,27.63 v24.25,27.63
DP  (via drill 0.3)
  Top 0.127: J4.A6 24.95,28.58 24.95,29.16 24.76,29.35 24.25,29.35 24.06,29.16 24.06,28.58 J4.B6 24,28.52 24,28.01 23.43,27.44 v23.43,27.19 | v2.92,5.34 2.41,5.85 2.03,5.85 D3.3 | v9.08,10.3 13.65,10.3 14.92,11.57 14.92,18.3 v17.21,20.58 | v19.11,22.49 19.11,24.08 19.24,24.2 19.24,24.9 v20.95,26.62
  Bottom 0.127: v2.92,5.34 4.12,5.34 v9.08,10.3 | v19.11,22.49 v17.21,20.58 | v20.95,26.62 22.86,26.62 v23.43,27.19
EPD_3V3  (via drill 0.3)
  Top 0.127: v12.38,16.33 12.51,16.46 EDP_C5.2 | J2.16 10.41,15.76 10.41,16.14 J2.15 10.47,16.26 10.54,16.33 v11.17,16.33 11.24,16.33 13.46,18.55 C1-ED-DR.1 13.52,18.61 14.35,19.44 14.35,20.46 18.09,24.2 v18.09,24.33 | v39.43,24.71 40.32,24.71 42.16,26.55 43.94,26.55 Q1.3 | v16.13,13.28 17.65,13.28 18.41,12.52 18.41,11.63 19.87,10.17 19.87,7.09 L5.2
  Bottom 0.127: v11.17,16.33 v12.38,16.33 15.43,13.28 v16.13,13.28 | v39.43,24.71 35.94,24.71 34.54,26.11 19.87,26.11 v18.09,24.33
EPD_BUSY  (via drill 0.3)
  Top 0.127: v24.45,10.42 24.45,10.68 25.97,12.2 26.8,12.2 28.13,13.53 28.13,13.79 U1.P$AD12 | v9.71,18.8 10.09,19.19 10.41,19.19 J2.9
  Bottom 0.127: v24.45,10.42 16,10.42 13.97,8.39 11.81,8.39 10.47,9.72 10.47,18.04 v9.71,18.8
EPD_CS  (1 unrouted)
EPD_DC  (via drill 0.3)
  Top 0.127: v23.37,9.98 25.84,12.46 26.67,12.46 27.62,13.41 27.62,13.79 U1.P$AD10 | v9.71,17.79 10.09,18.17 10.41,18.17 J2.11
  Bottom 0.127: v23.37,9.98 15.94,9.98 14.09,8.14 11.68,8.14 10.22,9.6 10.22,17.28 v9.71,17.79
EPD_RST  (1 unrouted)
ESP_3V1
  Top 0.127: EDP_C6.2 12.89,15.57 11.62,15.57 10.79,14.74 10.47,14.74 J2.18
ESP_3V2
  Top 0.127: EDP_C7.2 12.82,14.8 11.3,14.8 10.73,14.23 10.47,14.23 J2.19
ESP_3V4  (via drill 0.3)
  Top 0.127: v13.9,13.98 13.4,13.98 EDP_C8.2 | v11.17,13.98 10.98,13.98 10.73,13.72 10.47,13.72 J2.20
  Bottom 0.127: v11.17,13.98 v13.9,13.98
ESP_3V6  (via drill 0.3)
  Top 0.127: v13.84,12.52 13.33,12.52 EDP_C10.2 | v11.17,12.52 10.92,12.52 10.79,12.65 10.47,12.65 J2.22
  Bottom 0.127: v11.17,12.52 v13.84,12.52
GDR
  Top 0.127: Q3.1 39.11,29.92 38.61,30.43 37.21,30.43 R2_EP_DR.1 37.14,30.49 35.18,32.46 35.18,34.17 34.86,34.49 28.83,34.49 26.48,32.14 19.11,32.14 15.37,28.39 15.37,26.62 11.49,22.74 10.47,22.74 J2.2
GND  (via drill 0.3, 0.35)
  Top 0.127: J1.5 41.34,9.28 40.13,9.28 J1.3 40.07,9.22 40.07,8.84 39.05,7.82 39.05,6.74 36.7,4.39 35.46,4.39 SW_DN.1 35.43,4.31 35.43,4.57 34.02,5.98 33.46,5.98 C29.1 33.4,6.04 33.4,6.23 32.95,6.68 32.95,9.92 C9.2 32.95,9.98 32.95,10.61 34.22,11.88 34.22,12.01 C8.2 34.29,12.07 v34.29,13.15 | v33.27,14.93 33.53,15.19 34.99,15.19 35.3,14.87 35.3,14.74 C3.2 | C11.2 33.78,20.65 33.78,19.31 C10.2 33.84,19.25 33.84,18.42 | 33.84,18.42 33.84,18.11 34.1,17.85 X1.4 | U1.P$74 30.29,18.87 30.54,18.61 31.18,18.61 U1.P$F23 31.24,18.55 31.37,18.42 33.84,18.42 | 26.67,18.93 26.92,19.19 26.92,19.82 U1.P$B7 26.92,19.88 26.92,20.14 26.86,20.2 26.86,21.09 28.07,22.3 28.07,22.87 C16.2 | 26.67,18.93 U1.P$74 | 26.67,15.38 26.67,16.46 U1.P$83 | 26.67,15.38 U1.P$74 | U1.P$79 26.67,17.73 27.24,18.3 U1.P$74 | 26.67,18.93 U1.P$75 | 26.67,18.93 U1.P$74 | U1.P$84 27.81,16.52 U1.P$74 | U1.P$80 27.81,17.73 U1.P$74 | U1.P$74 28.45,17.09 29.02,16.52 U1.P$85 29.08,16.52 30.22,16.52 U1.P$86 | U1.P$81 29.02,17.73 U1.P$74 | U1.P$76 27.81,18.87 27.3,18.36 U1.P$74 | 29.65,18.3 29.08,18.87 U1.P$77 | 29.65,18.3 U1.P$74 | 29.65,18.3 30.22,17.73 U1.P$82 | 29.65,18.3 U1.P$74 | U1.P$78 30.29,18.93 U1.P$74 | U1.P$90 30.22,15.31 29.08,15.31 U1.P$74 | EDP_C12.2 13.27,10.99 13.27,11.76 EDP_C11.2 13.33,11.82 v13.9,11.82 | U1.P$89 29.02,15.31 27.87,15.31 U1.P$88 27.81,15.31 26.67,15.31 U1.P$87 26.67,15.38 | 26.67,15.38 U1.P$74 | C42.1 2.28,9.92 2.28,9.22 1.2,8.14 1.2,7.37 1.71,6.87 1.97,6.87 D3.2 2.03,6.8 2.28,6.8 3.36,5.72 3.36,4.33 C43.2 3.43,4.26 3.43,4.07 3.68,3.82 6.92,3.82 7.43,4.33 TP_GND.TP 7.49,4.39 8.65,5.55 13.38,5.55 13.5,5.44 13.5,5.29 13.52,5.26
  Top 0.127: 13.52,5.26 13.52,4.21 SW_UP.1 14.62,4.24 14.8,4.06 15.35,4.06 15.4,4.01 20.44,4.01 20.82,4.39 20.82,6.42 22.29,7.88 22.32,7.92 | 13.52,5.26 13.52,5.98 C30.1 13.59,6.04 13.71,6.04 14.6,6.93 14.6,10.87 15.17,11.44 15.17,16.33 16.25,17.41 17.08,17.41 | C6.2 24.06,15.12 23.62,15.57 22.6,15.57 21.97,14.93 19.94,14.93 C19.2 19.87,14.87 19.75,14.87 19.43,14.55 19.43,14.17 20.35,13.25 | 20.35,13.25 20.38,13.22 23.37,13.22 23.87,13.72 24.06,13.72 C20.2 | C7.2 29.46,11.06 29.46,10.93 29.14,10.61 28,10.61 27.56,11.06 C21.2 27.75,10.8 23.59,6.64 | SW_ENT.1 24.19,4.29 24.19,4.52 23.24,5.47 23.24,6.17 C31.1 23.18,6.23 23.59,6.64 | 22.32,7.92 23.56,6.68 23.59,6.64 | 22.32,7.92 20.82,9.41 20.82,9.6 19.43,10.99 19.43,11.57 20.32,12.46 20.32,13.22 20.35,13.25 | IC2.B1 2.41,28.71 2.09,29.03 2.09,29.28 2.41,29.6 2.41,31.06 C32.1 2.47,31.12 2.47,31.25 2.6,31.38 3.05,31.38 5.39,29.03 5.39,28.58 C34.1 5.39,28.52 5.39,27.89 6.41,26.87 6.6,26.87 7.74,25.73 7.74,24.01 J2.MP1 | IC9.C3 10.22,27.19 10.54,27.19 IC9.C2 10.6,27.19 10.92,27.19 IC9.C1 10.98,27.12 10.98,26.74 IC9.B1 11.05,26.74 12.63,26.74 12.95,26.43 C24.1 | C24.1 12.95,26.23 12.95,25.09 C23.2 12.89,25.03 12.89,24.9 11.94,23.95 7.87,23.95 J2.MP1 | J2.MP2 7.81,10.93 7.81,23.95 J2.MP1 | C22.2 38.73,15.19 38.73,16.01 40.89,18.17 C4.2 40.95,18.23 40.95,18.36 42.16,19.57 42.99,19.57 43.18,19.76 43.18,20.14 42.92,20.39 42.61,20.39 U2.6 42.54,20.46 41.84,20.46 41.65,20.65 U2.9 | U2.1 40.64,21.41 40.89,21.41 41.59,20.71 U2.9 | 39.14,18.46 40.57,19.88 U2.4 40.64,19.95 40.89,19.95 41.59,20.65 U2.9
  Top 0.127: 39.14,18.46 38.73,18.04 38.73,17.92 C1.2 | 36.29,20.8 36.32,20.84 36.76,20.84 38.32,19.28 | 36.29,20.8 36.06,20.58 36.06,20.46 C2.1 | 38.32,19.28 39.11,18.49 39.14,18.46 | X1.2 35.62,16.71 35.75,16.71 38.29,19.25 38.32,19.28 | 38.99,24.39 40.38,23 40.57,23 C27.1 | 38.99,24.39 38.99,24.9 39.75,25.66 39.75,25.85 SJ1.1 | R2_EP_DR.2 37.14,29.85 36.7,29.41 35.18,29.41 R_TYPE_SEL.2 35.11,29.35 34.92,29.16 34.86,29.16 33.84,28.14 33.84,24.39 TP_BAT_GND.TP | 36,24.39 33.91,24.39 TP_BAT_GND.TP | 36,24.39 38.99,24.39 | 36,24.39 36,21.22 36.26,20.96 36.26,20.84 36.29,20.8 | 7.81,31.76 v8.89,31.76 9.33,31.76 9.39,31.69 C38.1 9.39,30.93 10.22,30.11 10.22,29.85 C25.2 | 7.81,31.76 7.68,31.76 IC1.D2 7.62,31.76 7.24,31.38 5.08,31.38 4.7,31.76 R9.1 | 7.81,31.76 7.81,28.71 C33.2 | IC2.B3 3.49,28.65 3.81,28.33 3.81,27.5 3.3,27 2.16,27 1.27,27.89 1.27,30.81 2.35,31.89 4.63,31.89 4.7,31.82 R9.1 | C39.2 4.76,32.52 4.76,31.82 R9.1 | 13.52,21.6 13.52,22.04 EDP_C2.1 | 13.52,21.6 13.52,21.15 EDP_C1.1 13.46,21.09 13.46,19.69 C1-ED-DR.2 13.4,19.69 10.47,19.69 J2.8 10.41,19.69 9.97,19.69 9.27,19 9.27,16.07 10.09,15.25 10.41,15.25 J2.17 10.47,15.25 10.79,15.25 11.94,16.39 11.94,16.52 12.32,16.9 13.14,16.9 13.4,16.65 13.4,16.52 EDP_C5.1 13.4,15.63 EDP_C6.1 13.4,15.57 13.4,14.87 EDP_C7.1 13.33,14.8 13.33,14.61 12.89,14.17 12.89,14.04 EDP_C8.1 12.89,13.98 12.89,13.28 EDP_C9.1 12.82,13.22 12.82,12.52 EDP_C10.1 | v9.46,33.09 9.46,32.46 C37.1 | J4.SH1 29.08,33.28 30.92,31.44 30.92,31.31 D4.1 30.92,31.25 29.08,29.41 J4.SH3 29.02,29.09 28.51,28.58 28,28.58 J4.A1_B12 27.94,28.52 27.94,27.31 25.97,25.35 R1_USB.1
  Top 0.127: IC3.8 17.78,14.68 17.78,15.12 IC3.9 17.84,15.12 17.97,15.25 18.03,15.25 18.16,15.38 18.16,15.95 17.07,17.04 R3.1 17.08,17.09 17.08,17.41 | 17.08,17.41 17.08,19.19 C18\.1 17.14,19.25 17.14,19.44 17.84,20.14 18.54,20.14 20.7,22.3 20.7,22.36 22.22,23.89 24.83,23.89 | C17.1 21.33,21.98 21.33,22.11 22.6,23.38 23.11,23.38 23.37,23.12 23.37,23 C5.2 23.43,22.93 23.68,22.68 24.51,22.68 24.83,23 24.83,23.12 C14.2 24.83,23.19 24.83,23.89 | C16.2 28.13,22.93 28.32,22.93 29.14,23.76 C13.2 29.21,23.82 29.21,23.95 29.46,24.2 29.97,24.2 30.45,23.73 | C16.2 28.13,23 28.13,23.06 27.37,23.82 27.05,23.82 C15.2 26.98,23.89 26.98,24.2 25.91,25.28 R1_USB.1 | 30.45,23.73 30.48,23.69 30.48,22.93 C12.2 | J4.SH4 20.44,29.09 20.95,28.58 21.52,28.58 J4.A12_B1 21.59,28.52 21.59,27.06 | 24.83,25.35 25.91,25.35 R1_USB.1 | 24.83,25.35 22.98,25.35 R2_USB.2 22.92,25.28 21.59,26.62 21.59,27.06 | 24.83,25.35 24.83,23.89 | 13.52,21.6 14.73,21.6 20.19,27.06 21.59,27.06 | TP_BAT_GND.TP 33.78,24.33 31.05,24.33 30.48,23.76 30.45,23.73 | C24.1 12.95,26.49 13.78,26.49 15.11,27.82 15.11,28.52 19.87,33.28 20.38,33.28 J4.SH2
  Bottom 0.127: U1.P$90 30.29,15.25 31.24,15.25 31.56,14.93 v33.27,14.93 34.29,13.92 v34.29,13.15 | v13.9,11.82 15.37,11.82 17.59,14.04 25.4,14.04 26.6,15.25 U1.P$87 | J4.SH4 20.44,33.28 J4.SH2 16.06,33.3 15.8,33.05 15.46,33.05 14.21,34.3 10.67,34.3 v9.46,33.09 8.89,32.52 v8.89,31.76
  other vias: 32.53,33.09 15.18,23.62 8.57,6.89 26.55,8.63 39.32,18.91 39.72,5.61 34.5,8.81 43.55,13.4 43.96,28.73 32.99,22.34 36.61,18.74 41.62,14.95 36.66,14.92 28.23,2.07 44.44,6.72 40.41,2.25 17.6,2.25 3.58,2.93 9.75,24.71 7,30.35 4.42,26.36 15.68,31.45 14.61,29.58 18.6,27.85 36.99,24.01 30.55,24.71 32.45,18.1 34.08,9.95 30.8,9.67
  pour Top (isolate 0.305): 7.56,34.81 7.64,34.72 39.56,34.72 39.64,34.81 39.87,34.58 40.35,34.58 40.73,34.2 41.06,34.2 41.46,33.8 42.08,33.8 43.54,32.34 43.69,32.34 45.02,31.01 45.02,29.61 45.13,29.61 45.61,29.13 45.61,19.56 45.61,19.56 45.61,17.22 45.53,17.14 42.7,17.14 42.67,17.17 42.67,14.09 42.64,14.07 45.76,14.07 45.77,14.08 45.77,5.88 44.91,5.02 44.91,3.7 42.08,0.87 41.18,0.87 40.8,0.49 36.69,0.49 36.69,2.53 36.67,2.55 31.06,2.55 30.98,2.47 30.98,0.52 31.05,0.44 25.75,0.44 25.63,0.56 25.63,2.67 25.61,2.69 20.15,2.69 20.12,2.67 20.12,0.35 20.15,0.33 14.86,0.33 14.66,0.54 14.66,2.52 14.92,2.79 9.37,2.79 9,2.42 9,0.35 9.04,0.31 6.18,0.31 5.62,0.87 4.28,0.87 3.26,1.9 2.86,1.9 1.1,3.66 1.1,4.63 0.53,5.2 0.53,10.34 0.48,10.39 7.14,10.39 7.26,10.26 7.26,24.61 7.18,24.7 6.64,24.7 6.53,24.6 0.48,24.6 0.41,24.67 0.41,29.43 0.38,29.46 0.38,29.79 0.65,30.07 0.65,30.65 1.04,31.04 1.04,31.36 2.99,33.31 2.99,33.32 3.42,33.76 3.8,33.76 4.31,34.27 5.36,34.27 5.71,34.61 7.07,34.61 7.27,34.82 7.53,34.82 7.53,34.82 7.55,34.82 7.56,34.81
  pour Bottom (isolate 0.305): 7.94,34.85 39.38,34.85 39.45,34.78 40.09,34.78 40.32,34.55 40.86,34.55 41.08,34.33 41.61,34.33 42.56,33.39 42.81,33.39 44.29,31.91 44.36,31.91 44.76,31.51 44.76,31.31 45.13,30.94 45.13,30.23 45.6,29.76 45.6,28.89 45.76,28.73 45.76,17.13 45.7,17.07 42.72,17.07 42.74,17.05 42.74,14.12 45.77,14.12 45.83,14.07 45.83,6.16 45.7,6.02 45.7,5.74 45.69,5.73 45.69,5.48 45.28,5.08 45.28,4.8 45.13,4.65 45.13,3.93 43.92,2.71 43.92,2.44 42.7,1.23 42.26,1.23 41.76,0.73 41.35,0.73 41.1,0.47 40.65,0.47 40.61,0.43 36.59,0.43 36.61,0.45 36.61,2.62 31.19,2.62 31.11,2.54 31.11,0.4 31,0.3 25.67,0.3 25.65,0.27 25.65,2.68 25.57,2.77 20.28,2.77 20.2,2.68 20.2,0.34 20.25,0.28 14.71,0.28 14.71,2.6 14.54,2.78 9.53,2.78 9.39,2.63 9.39,0.38 9.32,0.31 5.83,0.31 5.72,0.42 5.11,0.42 4.96,0.57 4.64,0.57 0.61,4.6 0.61,5.19 0.33,5.47 0.33,10.36 0.31,10.38 7.22,10.38 7.24,10.39 7.24,24.44 7.12,24.56 0.47,24.56 0.36,24.67 0.36,29.42 0.39,29.45 0.39,29.87 0.57,30.04 0.57,30.35 0.8,30.58 0.8,30.99 1.54,31.73 1.54,31.96 1.84,32.25 1.84,32.54 1.93,32.54 2.7,33.3 2.81,33.3 3.12,33.61 3.32,33.61 3.73,34.02 4.12,34.02 4.43,34.33 5.22,34.33 5.54,34.65 5.93,34.65 6.02,34.74 7.13,34.74 7.27,34.88 7.75,34.88 7.78,34.85 7.93,34.85 7.93,34.85 7.93,34.85 7.93,34.85 7.93,34.85 7.93,34.85 7.93,34.85 7.93,34.85
GND1  (via drill 0.3)
  Top 0.127: v24.13,19.12 24.19,19.06 25.65,19.06 U1.P$D2 | v22.86,19.12 22.03,19.12 X2.2 22.03,19.19 21.84,19.38 21.84,21.92 C17.2
  Bottom 0.127: v22.86,19.12 v24.13,19.12
GND2  (via drill 0.3)
  Top 0.127: v23.68,18.68 25.27,18.68 25.33,18.61 25.65,18.61 U1.P$F2 | v20.38,18.68 19.87,18.68 19.49,19.06 X2.1 19.43,19.12 19.37,19.19 17.65,19.19 C18\.2
  Bottom 0.127: v20.38,18.68 v23.68,18.68
GND3
  Top 0.127: 35.78,19.98 35.81,19.95 36.19,19.95 36.51,20.27 36.51,20.39 C2.2 | 35.78,19.98 34.35,21.41 32.95,21.41 31.94,20.39 31.24,20.39 U1.P$A23 | X1.3 35.62,17.85 35.62,19.82 35.75,19.95 35.78,19.98
HAPTIC_EN  (1 unrouted)
IMU_INT1
  Top 0.127: U1.P$N1 25.14,16.84 21.78,16.84 20.19,15.25 19.49,15.25 17.97,13.72 17.02,13.72 16.76,13.98 16.76,14.11 IC3.5
IMU_INT2  (1 unrouted)
LX1
  Top 0.127: IC9.B2 10.54,26.74 10.22,26.74 IC9.B3 9.59,26.74 8.95,27.38 8.95,28.08 9.84,28.96 10.73,28.96 12,30.23 12,31.19 11.81,31.38 11.81,33.28 L7.1
LX2  (via drill 0.3)
  Top 0.127: IC9.D2 10.54,27.57 10.22,27.57 IC9.D3 10.16,27.57 v9.39,27.57 | v13.4,31.44 13.4,32.84 13.84,33.28 L7.2
  Bottom 0.127: v9.39,27.57 9.39,28.01 9.33,28.08 9.33,28.84 11.36,30.87 12.82,30.87 v13.4,31.44
MOSI  (1 unrouted)
N$1  (via drill 0.3)
  Top 0.127: v25.52,20.58 25.91,20.2 25.91,19.88 U1.P$B3 | v18.35,20.58 17.71,21.22 L2.1
  Bottom 0.127: v18.35,20.58 v25.52,20.58
N$2
  Top 0.127: L2.2 18.67,21.28 18.67,24.52 L3\.1
N$3  (via drill 0.3)
  Top 0.127: 32.19,18.87 32.89,18.87 33.27,19.25 C10.1 | 32.19,18.87 31.68,18.87 U1.P$E24 | 27.46,22.77 27.56,22.87 C16.1 | 27.46,22.77 27.08,22.39 | 27.08,22.39 26.48,21.79 26.48,19.88 U1.P$B5 | 27.46,22.77 27.43,22.8 26.54,23.69 26.54,23.82 C15.1 26.48,23.89 v25.84,24.52 | v24.38,24.52 19.75,24.52 L3\.2 | v27.3,22.17 27.11,22.36 27.08,22.39 | 32.19,18.87 v32.19,18.96
  Bottom 0.127: v25.84,24.52 v24.38,24.52 | v27.3,22.17 27.81,22.17 31.03,18.96 v32.19,18.96
N$4
  Top 0.127: R_TYPE_SEL.1 35.18,28.78 36.26,28.78 37.14,27.89 R1_EP_DR1.2 37.14,27.82 37.14,27 38.22,25.92 SJ1.2
N$5
  Top 0.127: IC1.D1 7.17,31.82 5.33,31.82 R9.2
N$6  (via drill 0.3)
  Top 0.127: C2-EP-DR.2 35.75,33.85 40.64,33.85 41.65,32.84 D5.2 41.65,32.78 41.27,32.39 41.27,29.28 Q3.3 41.27,29.22 v41.27,27.82 | v17.33,4.9 16.94,5.3 L5.1
  Bottom 0.127: v41.27,27.82 45.34,23.76 45.34,9.85 40.38,4.9 v17.33,4.9
N$7
  Top 0.127: C2-EP-DR.1 34.54,33.85 34.54,31.38 34.48,31.31 D4.2 34.41,31.25 32.06,28.9 32.06,26.93 D2.1
N$8
  Top 0.127: R1_USB.2 25.97,25.98 25.97,28.52 J4.A5
N$9
  Top 0.127: R2_USB.1 22.98,25.85 22.98,28.52 J4.B5
N$11
  Top 0.127: EDP_C2.2 13.97,22.11 13.97,22.23 13.71,22.49 12.32,22.49 11.55,21.73 10.47,21.73 J2.4
N$12  (via drill 0.3)
  Top 0.127: v13.9,20.46 13.97,20.52 13.97,21.09 EDP_C1.2 | v11.55,20.46 10.86,21.15 10.47,21.15 J2.5
  Bottom 0.127: v11.55,20.46 v13.9,20.46
N$14
  Top 0.127: C32.2 2.86,31.06 2.86,29.28 2.92,29.22 IC2.A2
N$15
  Top 0.127: U1.P$A18 29.65,20.39 29.65,23.76 C13.1
N$19
  Top 0.127: U1.P$D23 31.24,19.12 31.49,19.12 33.02,20.65 33.27,20.65 C11.1
N$20
  Top 0.127: U1.P$B24 31.68,19.88 31.81,19.88 33.08,21.15 34.03,21.15 34.86,20.33 34.86,17.28 34.29,16.71 34.16,16.71 X1.1 34.35,16.71 35.05,16.01 36.19,16.01 38.03,17.85 38.16,17.85 C1.1
N$21
  Top 0.127: IC9.D1 10.98,27.5 11.49,27.5 11.87,27.12 12.51,27.12 R1.2
N$22  (via drill 0.3)
  Top 0.127: v11.55,28.52 10.98,27.95 IC9.E1 | v12.95,28.65 12.57,28.27 12.44,28.27 R2.2
  Bottom 0.127: v11.55,28.52 12.82,28.52 v12.95,28.65
N$27
  Top 0.127: EDP_C12.1 12.76,10.99 11.17,10.99 10.47,11.69 J2.24
N$28
  Top 0.127: IC3.1 16.25,15.69 16.25,16.84 16.44,17.03 R3.2
N$39
  Top 0.127: U1.P$AC5 26.41,14.3 23.56,14.3 23.05,13.79 C20.1
N$69  (via drill 0.3)
  Top 0.127: v32.83,12.46 32.83,15.69 31.68,16.84 U1.P$N24 | v32.51,10.55 32.51,10.11 32.38,9.98 C9.1
  Bottom 0.127: v32.83,12.46 32.83,10.87 v32.51,10.55
N$74  (via drill 0.3)
  Top 0.127: 41.5,17.25 41.53,17.28 41.53,18.17 C4.1 41.59,18.23 42.03,18.23 43.81,20.01 43.81,21.15 42.54,22.42 37.46,22.42 L1.2 | 41.5,17.25 38.99,14.74 38.41,14.74 38.29,14.87 38.29,14.93 38.1,15.12 C22.1 | v42.42,17.03 43.81,15.63 ANT1.1 | v41.53,17.22 41.5,17.25
  Bottom 0.127: v42.42,17.03 41.72,17.03 v41.53,17.22
N$75  (via drill 0.3)
  Top 0.127: v31.24,17.6 31.24,18.04 U1.P$H23 | v34.1,14.74 34.73,14.74 C3.1 | v36.45,21.41 36.45,22.42 L1.1
  Bottom 0.127: v34.1,14.74 31.94,16.9 | 31.94,16.9 v31.24,17.6 | 31.94,16.9 v36.45,21.41
OUT+
  Top 0.127: IC2.A3 3.49,29.16 6.03,26.62 6.03,25.73 TP_OP.TP
OUT-  (via drill 0.3)
  Top 0.127: v8.76,26.55 3.68,31.63 2.47,31.63 1.52,30.68 1.52,28.01 2.28,27.25 3.17,27.25 3.43,27.5 3.43,28.14 IC2.C3 | v15.81,28.2 15.81,27.82 16.57,27.06 TP_ON.TP
  Bottom 0.127: v8.76,26.55 10.29,26.55 11.94,28.2 v15.81,28.2
P0.13  (via drill 0.3)
  Top 0.127: v26.48,12.9 27.18,13.6 27.18,13.79 U1.P$AD8 | v13.52,6.49 13.21,6.17 13.21,6.04 C30.2 13.14,6.04 10.92,6.04 R5.2 9.95,5.98 v9.65,6.28 | v9.58,4.59 10.39,4.59 SW_UP.2
  Bottom 0.127: v26.48,12.9 26.48,12.07 26.6,11.95 26.6,11.57 21.52,6.49 v13.52,6.49 | v9.65,6.28 9.65,4.66 v9.58,4.59
P0.14  (via drill 0.3)
  Top 0.127: v26.92,14.3 27.37,14.3 U1.P$AC9 | v22.86,6.74 C31.2 22.79,6.23 22.29,6.23 | 22.29,6.23 21.33,6.23 R8.2 | 22.29,6.23 22.29,5.6 21.46,4.77 21.46,4.34 SW_ENT.2
  Bottom 0.127: v26.92,14.3 26.92,10.8 v22.86,6.74
P1.01  (via drill 0.3)
  Top 0.127: v31.24,14.61 31.24,15.06 U1.P$Y23 | v44.26,21.28 44.26,21.79 R_PWR_EPD.2 | v43.75,23.76 43.05,24.46 Q1.1
  Bottom 0.127: v31.24,14.61 32.19,14.61 34.1,12.71 35.68,12.71 40.83,17.85 43.37,17.85 44.26,18.74 v44.26,21.28 43.75,21.79 v43.75,23.76
P1.02
  Top 0.127: U1.P$W24 31.68,15.31 32.45,14.55 32.45,12.71 31.94,12.2 31.94,6.04 R7.2 32,6.04 32.7,6.04 | 32.7,6.04 33.08,6.04 C29.2 | 32.7,6.04 32.7,4.31 SW_DN.2
PMIC_INT  (1 unrouted)
PREVGH  (via drill 0.3)
  Top 0.127: v13.9,13.22 13.4,13.22 EDP_C9.2 | v11.17,13.22 10.47,13.22 J2.21 10.41,13.15 10.09,13.15 v9.52,12.58 | v38.22,30.87 38.22,32.78 D5.1
  Bottom 0.127: v13.9,13.22 v11.17,13.22 | v38.22,30.87 38.22,29.92 44.32,23.82 44.32,21.85 44.7,21.47 44.7,11.82 42.61,9.72 40.95,9.72 39.05,7.82 39.05,6.74 37.65,5.34 13.4,5.34 9.52,9.22 v9.52,12.58
PREVGL  (via drill 0.3)
  Top 0.127: EDP_C11.1 12.76,11.82 11.11,11.82 10.73,12.2 10.47,12.2 J2.23 10.41,12.2 10.09,12.2 9.84,11.95 9.84,11.5 10.79,10.55 13.52,10.55 14.35,11.37 14.35,18.8 18.22,22.68 v18.22,23.69 | v34.35,25.66 35.56,26.87 D2.2
  Bottom 0.127: v34.35,25.66 20.19,25.66 v18.22,23.69
RESE  (via drill 0.3)
  Top 0.127: Q3.2 39.11,28.58 39.05,28.52 37.21,28.52 R1_EP_DR1.1 37.14,28.52 v36.76,28.9 | v20.44,27.69 18.54,25.79 15.24,25.79 11.68,22.23 10.47,22.23 J2.3
  Bottom 0.127: v20.44,27.69 20.57,27.69 21.27,28.39 21.27,29.47 21.21,29.54 21.21,30.04 20.95,30.3 20.95,30.68 21.21,30.93 34.73,30.93 v36.76,28.9
RESET  (via drill 0.3)  (1 unrouted)
  Top 0.127: v42.29,11.88 41.4,10.99 41.4,10.55 J1.6 | v26.29,6.74 26.03,6.74 25.21,5.92 TP_RESET.TP
  Bottom 0.127: v42.29,11.88 39.51,9.11 34.83,9.11 34.68,9.25 34.32,9.25 31.81,6.74 v26.29,6.74
SCK  (via drill 0.3)
  Top 0.127: v27.43,20.77 27.75,20.77 28.13,20.39 U1.P$A12 | v12.32,18.04 11.55,18.04 10.73,17.22 10.47,17.22 J2.13
  Bottom 0.127: v27.43,20.77 26.6,20.77 22.69,16.86 17.06,16.86 15.95,15.76 14.6,15.76 v12.32,18.04
SCL  (via drill 0.3)  (1 unrouted)
  Top 0.127: v6.41,32.65 7.17,32.65 IC1.B1 | v1.97,28.2 2.41,28.2 IC2.C1 | R17.1 42.1,2.1 42.1,3.44 42.8,4.14 TP_SCL.TP 42.86,4.2 42.86,6.99 43.69,7.82 v43.69,11.63 | v16.76,15.12 16.76,15.63 IC3.12 | v43.37,20.96 42.61,20.96 U2.7 | v13.97,27.31 12.89,27.31 12.57,27.63 R1.1 12.51,27.63 v12,27.63 12,28.96 12.25,29.22 v12.25,31.57 | v38.1,14.42 37.46,15.06 v37.46,15.31
  Bottom 0.127: v1.97,28.2 v6.41,32.65 6.73,32.65 7.78,33.7 8.17,33.7 8.44,33.42 8.44,31.57 8.7,31.31 9.39,31.31 9.65,31.57 v12.25,31.57 | v16.76,15.12 14.6,15.12 11.11,18.61 11.11,26.74 v12,27.63 | v43.37,20.96 37.91,20.96 37.88,21 | 37.88,21 35.62,23.25 18.03,23.25 v13.97,27.31 | v43.69,11.63 40.89,14.42 v38.1,14.42 | v37.46,15.31 37.46,20.58 37.84,20.96 37.88,21
SDA  (via drill 0.3)  (1 unrouted)
  Top 0.127: v12.82,32.14 12.82,29.22 12.44,28.84 R2.1 | IC1.C1 7.17,32.2 6.22,32.2 5.97,32.46 5.97,32.79 6.71,33.53 6.75,33.53 7.07,33.85 v10.86,33.85 | R18.1 38.99,1.6 38.99,4.01 39.05,4.07 TP_SDA.TP 38.99,4.07 v37.02,4.07 | v22.54,17.35 v24.7,17.35 25.14,17.35 U1.P$L1 | v15.81,16.2 15.81,15.44 16.03,15.22 | 16.03,15.22 16.06,15.19 16.19,15.19 IC3.2 | v37.08,21.15 37.72,21.79 41.91,21.79 42.23,21.47 42.54,21.47 U2.8 | v17.97,4.45 17.97,9.53 15.43,12.07 15.43,14.61 16,15.19 16.03,15.22
  Bottom 0.127: v10.86,33.85 11.11,33.85 v12.82,32.14 17.52,32.14 18.79,30.87 18.79,30.43 16.13,27.76 13.78,27.76 13.52,27.5 13.52,21.47 16.89,18.11 16.89,17.35 16.92,17.31 | v22.54,17.35 16.95,17.35 16.92,17.31 | v15.81,16.2 16.92,17.31 | v37.08,21.15 37.08,21.41 36.64,21.85 35.8,21.85 32.49,18.54 32.27,18.54 32.03,18.3 25.65,18.3 v24.7,17.35 | v37.02,4.07 18.35,4.07 v17.97,4.45
SWDCLK  (via drill 0.3)
  Top 0.127: U1.P$AA24 31.68,14.8 32,14.49 v32,12.9 32,12.65 30.16,10.8 30.16,8.71 29.08,7.63 TP_SWDCLK.TP | v39.43,10.99 39.88,10.55 40.07,10.55 J1.4
  Bottom 0.127: v39.43,10.99 37.97,10.99 37.91,10.93 34.99,10.93 33.02,12.9 v32,12.9
SWDIO  (via drill 0.3)
  Top 0.127: 31.62,13.34 31.62,13.15 29.91,11.44 29.91,10.17 27.81,8.07 27.81,5.72 29.91,3.63 TP_SWDIO.TP | 31.62,13.34 31.62,14.3 U1.P$AC24 | v35.11,11.44 35.62,10.93 37.65,10.93 38.03,10.55 38.8,10.55 J1.2 | 31.62,13.34 v31.56,13.34
  Bottom 0.127: v35.11,11.44 34.86,11.44 32.95,13.34 v31.56,13.34
SWO
  Top 0.127: U1.P$AD22 30.67,13.79 30.54,13.79 28.89,12.14 27.68,12.14 26.92,11.37 26.92,10.68 25.78,9.53 22.41,9.53 21.97,9.98 TP_SWO.TP
VBAT  (via drill 0.3)
  Top 0.127: 9.75,32.23 9.78,32.27 9.78,32.39 C37.2 | 9.75,32.23 9.59,32.08 9.27,32.08 9.14,32.2 7.68,32.2 IC1.C2 | U2.2 40.64,20.9 40.64,20.46 U2.3 40.57,20.39 v39.81,20.39 | C27.2 40.64,23.31 44.51,23.31 45.21,22.61 45.21,18.68 44.58,18.04 TP_VBAT.TP 44.51,18.04 44.26,18.3 v43.18,18.3 | v11.55,30.43 9.78,32.2 9.75,32.23 | v17.97,30.23 19.94,30.23 20.19,30.49 v21.4,30.49
  Bottom 0.127: v39.81,20.39 41.08,20.39 42.26,19.22 | v43.18,18.3 42.26,19.22 | v11.55,30.43 17.78,30.43 v17.97,30.23 | v21.4,30.49 34.48,30.49 43.81,21.15 43.81,20.77 42.29,19.25 42.26,19.22
VBUS  (via drill 0.3)
  Top 0.127: 22.95,29.57 22.98,29.6 26.54,29.6 27.11,29.03 27.11,28.58 J4.A4_B9 | 22.95,29.57 22.41,29.03 22.41,28.58 J4.A9_B4 | v9.84,31.12 9.84,31.57 C38.2 | IC1.A2 7.68,33.03 7.93,33.28 v8,33.28 | v25.27,13.53 25.52,13.79 25.65,13.79 U1.P$AD2 | v26.16,11.76 26.16,11.31 26.35,11.12 C21.1 | v2.73,8.46 2.73,9.92 C42.2 | v3.55,7.63 3.55,7.5 4.19,6.87 4.51,6.87 D3.5 | C43.1 3.87,4.33 3.87,5.34 3.68,5.53 3.68,6.42 4.12,6.87 D3.5 | v11.43,9.41 7.36,9.41 4.82,6.87 4.57,6.87 D3.5 | v18.35,30.68 18.6,30.93 21.59,30.93 22.92,29.6 22.95,29.57
  Bottom 0.127: 8.54,31.09 8.57,31.06 9.78,31.06 v9.84,31.12 12.44,31.12 13.21,31.89 13.59,31.89 14.79,30.68 v18.35,30.68 | 8.54,31.09 8,31.63 v8,33.28 | v25.27,13.53 25.27,12.65 25.3,12.61 | v26.16,11.76 25.3,12.61 | v3.55,7.63 v2.73,8.46 | 25.3,12.61 25.27,12.58 21.21,12.58 20.44,11.82 16.38,11.82 13.97,9.41 v11.43,9.41 10.73,10.11 10.73,18.42 8.06,21.09 8.06,27.63 8.51,28.08 8.51,31.06 8.54,31.09
VREG  (via drill 0.3)
  Top 0.127: C23.1 12.51,25.09 12.51,26.23 C24.2 10.98,26.3 IC9.A1 10.92,26.36 10.6,26.36 IC9.A2 10.54,26.36 10.22,26.36 IC9.A3 10.16,26.3 9.52,26.3 9.08,25.85 8.44,25.85 v6.47,27.82 | v8.89,33.41 8.13,32.65 7.68,32.65 IC1.B2 | TP_VREG.TP 15.85,33.25 v15.63,33.47 | C39.1 4.47,32.75 4.47,32.86 5.56,33.96 v6.57,33.95
  Bottom 0.127: v6.47,27.82 6.47,28.08 6.03,28.52 2.92,28.52 2.16,27.76 1.78,27.76 1.52,28.01 1.52,28.9 v6.57,33.95 8.35,33.95 v8.89,33.41 8.89,33.47 9.97,34.55 14.41,34.55 15.5,33.47 v15.63,33.47